# Altium PCB HandTiePCB5.PcbDoc
Units mil, origin at the board's own origin, x right, y up, seen from the top; angles counter-clockwise.
Board outline 6000 x 4000 mil, 2 copper layers (Top Layer, Bottom Layer); 48 components, 53 nets, 210 pads, 0 vias.
Unrouted connection lines stored in the file: 102.
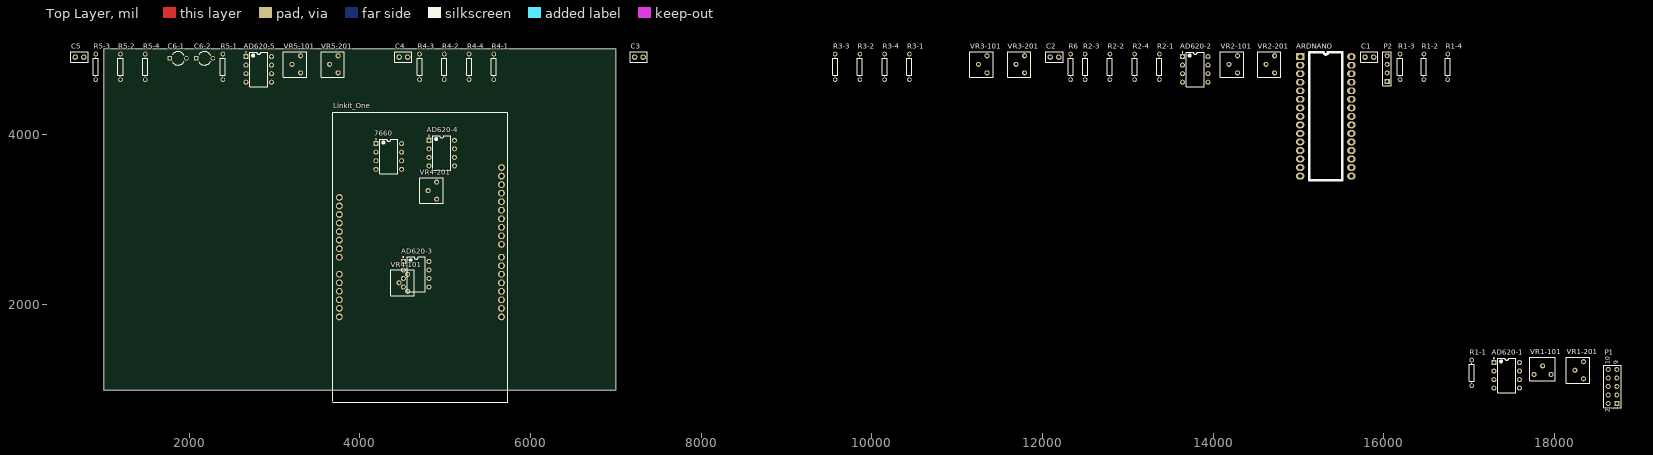
[diagram p0: Top Layer view]
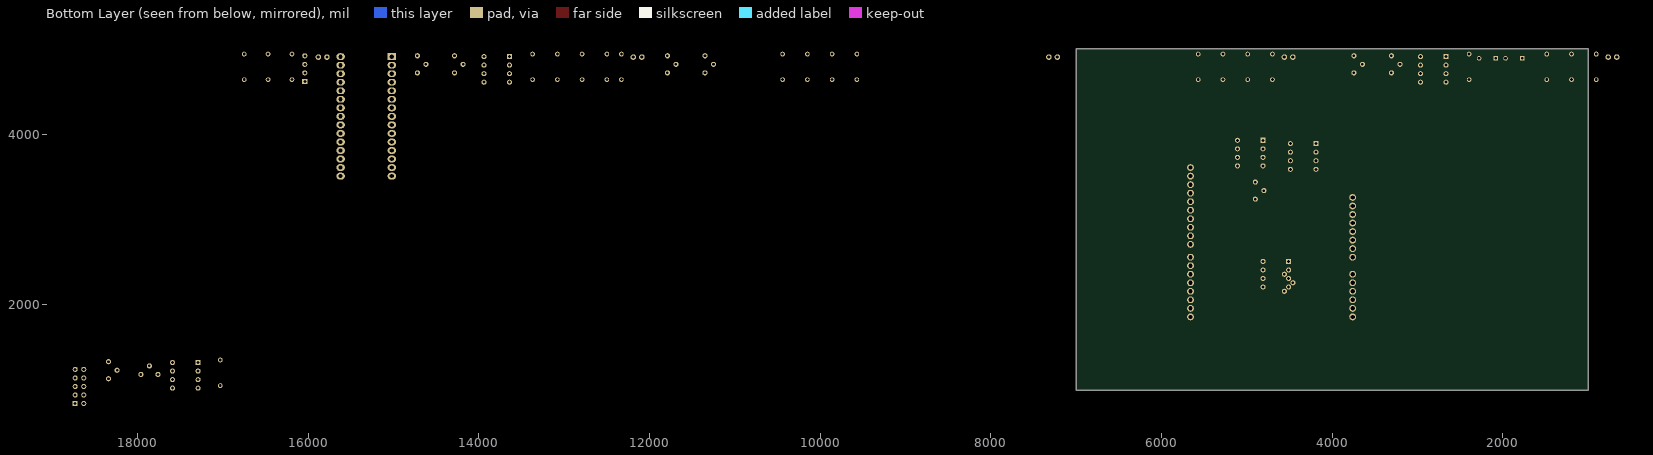
[diagram p1: Bottom Layer view, seen from below]

## Layer stack, top to bottom
Top Layer: signal copper 1.4
Dielectric: dielectric 12.6, FR-4, Dk 4.8
Bottom Layer: signal copper 1.4

## Board outline
1000,1000 7000,1000 7000,5000 1000,5000

## Design rules (kind name [scope] priority, off if disabled: settings)
Clearance [All] p1: gap=10
PolygonConnect [All] p1: connectstyle=Relief reliefconductorwidth=10 reliefentries=4 polygonreliefangle="90 Angle"
RoutingVias [All] p1: holewidth=28 width=50 viastyle="Through Hole" minholewidth=28 minwidth=50 maxholewidth=28 maxwidth=50
SilkscreenOverComponentPads [All] p1: minsilkscreentomaskgap=10
SolderMaskExpansion [All] p1: expansion=4
Width [All] p1: maxlimit=10 minlimit=10 preferedwidth=10
27 further rules are at their usual default settings.

## Components (designator, comment, footprint, x,y, rotation, side; value= is the part's Value field where it differs from the comment)
7660 "SW-DIP4" DIP-8 4340,3740 r0 top
AD620-1 "SW-DIP4" DIP-8 17440,1175 r0 top
AD620-2 "SW-DIP4" DIP-8 13790,4760 r0 top
AD620-3 "SW-DIP4" DIP-8 4660,2360 r0 top
AD620-4 "SW-DIP4" DIP-8 4960,3780 r0 top
AD620-5 "SW-DIP4" DIP-8 2815,4760 r0 top
ARDNANO "Arduino Nano" ARDNANO_DIP30 15020,4910 r0 top
C1 "Cap" CAPR2.54-5.1x3.2 15830,4905 r0 top
C2 "Cap" CAPR2.54-5.1x3.2 12140,4905 r0 top
C3 "Cap" CAPR2.54-5.1x3.2 7270,4905 r0 top
C4 "Cap" CAPR2.54-5.1x3.2 4510,4905 r0 top
C5 "Cap" CAPR2.54-5.1x3.2 715,4905 r0 top
C6-1 "Cap2" CAPR5-4X5 1870,4890 r0 top
C6-2 "Cap2" CAPR5-4X5 2180,4890 r0 top
Linkit_One "Linkit_One" Linkit_One 3760,3260 r0 top
P1 "Header 5X2" HDR2X5 18730,845 r90 top
P2 "Header 4" HDR1X4 16040,4620 r90 top
R1-1 "Res1" AXIAL-0.3 17030,1205 r90 top
R1-2 "Res1" AXIAL-0.3 16470,4790 r90 top
R1-3 "Res1" AXIAL-0.3 16190,4790 r90 top
R1-4 "Res1" AXIAL-0.3 16750,4790 r90 top
R2-1 "Res1" AXIAL-0.3 13370,4790 r90 top
R2-2 "Res1" AXIAL-0.3 12790,4790 r90 top
R2-3 "Res1" AXIAL-0.3 12500,4790 r90 top
R2-4 "Res1" AXIAL-0.3 13080,4790 r90 top
R3-1 "Res1" AXIAL-0.3 10440,4790 r90 top
R3-2 "Res1" AXIAL-0.3 9860,4790 r90 top
R3-3 "Res1" AXIAL-0.3 9570,4790 r90 top
R3-4 "Res1" AXIAL-0.3 10150,4790 r90 top
R4-1 "Res1" AXIAL-0.3 5570,4790 r90 top
R4-2 "Res1" AXIAL-0.3 4990,4790 r90 top
R4-3 "Res1" AXIAL-0.3 4700,4790 r90 top
R4-4 "Res1" AXIAL-0.3 5280,4790 r90 top
R5-1 "Res1" AXIAL-0.3 2395,4790 r90 top
R5-2 "Res1" AXIAL-0.3 1195,4790 r90 top
R5-3 "Res1" AXIAL-0.3 905,4790 r90 top
R5-4 "Res1" AXIAL-0.3 1485,4790 r90 top
R6 "Res1" AXIAL-0.3 12330,4790 r90 top
VR1-101 "VR" VarResistor 17760,1185 r0 top
VR1-201 "VR" VarResistor 18340,1135 r90 top
VR2-101 "VR" VarResistor 14285,4720 r90 top
VR2-201 "VR" VarResistor 14720,4720 r90 top
VR3-101 "VR" VarResistor 11350,4720 r90 top
VR3-201 "VR" VarResistor 11790,4720 r90 top
VR4-101 "VR" VarResistor 4560,2160 r90 top
VR4-201 "VR" VarResistor 4900,3240 r90 top
VR5-101 "VR" VarResistor 3305,4720 r90 top
VR5-201 "VR" VarResistor 3745,4720 r90 top

## Footprints (in the part's own frame and the unit in brackets; to place one, negate y for a bottom-side part, rotate by r counter-clockwise, add the part's x,y. Pads: shape width x height; smd on the part's side, far side on the other; paste and mask are expansions set on the pad)
ARDNANO_DIP30 [mil]
  rect 100x80 hole 50: 1(0,0)
  oval 100x80 hole 50: 2(0,-100) 3(0,-200) 4(0,-300) 5(0,-400) 6(0,-500) 7(0,-600) 8(0,-700) 9(0,-800) 10(0,-900) 11(0,-1000) 12(0,-1100) 13(0,-1200) 14(0,-1300) 15(0,-1400) 16(600,-1400) 17(600,-1300) 18(600,-1200) 19(600,-1100) 20(600,-1000) 21(600,-900) 22(600,-800) 23(600,-700) 24(600,-600) 25(600,-500) 26(600,-400) 27(600,-300) 28(600,-200) 29(600,-100) 30(600,0)
  silkscreen extent 105,-1450 495,50
AXIAL-0.3 [mm] "Axial Device, Thru-Hole; 2 Leads; 0.3 in Pin Spacing"
  round 1.4 hole 0.85: 1(-3.81,0) 2(3.81,0)
  silkscreen extent -2.77,-0.76 2.77,0.76
CAPR2.54-5.1x3.2 [mm] "Capacitor, Ceramic, Thru-Hole, Dipped Radial; Body 5.1 x 3.2 mm (WxT) Pin Spacing 2.54 mm (typ)"
  round 1.65 hole 1: 1(-1.27,0) 2(1.27,0)
  silkscreen extent -2.55,-1.6 2.55,1.6
CAPR5-4X5 [mm] "Capacitor; 2 Leads"
  rect 1.35x1.35 hole 0.8: 1(-2.5,0)
  round 1.35 hole 0.8: 2(2.5,0)
  silkscreen extent -1.69,-2 1.82,2
DIP-8 [mm] "DIP; 8 Leads; Row Spacing 7.62 mm; Pitch 2.54 mm"
  rect 1.5x1.5 hole 0.9: 1(-3.81,3.81)
  round 1.5 hole 0.9: 2(-3.81,1.27) 3(-3.81,-1.27) 4(-3.81,-3.81) 5(3.81,-3.81) 6(3.81,-1.27) 7(3.81,1.27) 8(3.81,3.81)
  silkscreen extent -3.93,-5.15 2.65,5.23, body extent -3.6,-5.15 3.6,5.15, height 5.08
HDR1X4 [mm] "Connector; Header; 4 Position"
  rect 1.5x1.5 hole 0.9: 1(0,0)
  round 1.5 hole 0.9: 2(2.54,0) 3(5.08,0) 4(7.62,0)
  silkscreen extent -1.27,-1.27 8.89,1.27
HDR2X5 [mm] "Connector; Header; 5x2 Position"
  rect 1.5x1.5 hole 0.9: 1(0,0)
  round 1.5 hole 0.9: 2(0,2.54) 3(2.54,0) 4(2.54,2.54) 5(5.08,0) 6(5.08,2.54) 7(7.62,0) 8(7.62,2.54) 9(10.16,0) 10(10.16,2.54)
  silkscreen extent -1.27,-1.27 11.43,3.81
Linkit_One [mil]
  round 80 hole 50 mask+4: 1(0,0) 2(0,-100) 3(0,-200) 4(0,-300) 5(0,-400) 6(0,-500) 7(0,-600) 8(0,-700) 9(0,-900) 10(0,-1000) 11(0,-1100) 12(0,-1200) 13(0,-1300) 14(0,-1400)
  round 80 hole 50: 15(1900,-1400) 16(1900,-1300) 17(1900,-1200) 18(1900,-1100) 19(1900,-1000) 20(1900,-900) 21(1900,-800) 22(1900,-700) 23(1900,-550) 24(1900,-450) 25(1900,-350) 26(1900,-250) 27(1900,-150) 28(1900,-50) 29(1900,50) 30(1900,150) 31(1900,250) 32(1900,350)
  silkscreen extent -75,-2400 1975,1000
VarResistor [mil]
  round 60 hole 30: 1(0,0) 2(100,100) 3(200,0)
  silkscreen extent -50,-75 250,200

## Part data
7660 AD620-1 AD620-2 AD620-3 AD620-4 AD620-5: "DIP Switch"
C1 C2 C3 C4 C5 C6-1 C6-2: "Capacitor"
P1: "Header, 5-Pin, Dual row"
P2: "Header, 4-Pin"
R1-1 R1-2 R1-3 R1-4 R2-1 R2-2 R2-3 R2-4 R3-1 R3-2 R3-3 R3-4 R4-1 R4-2 R4-3 R4-4 R5-1 R5-2 R5-3 R5-4 R6: "Resistor"
VR1-101 VR1-201 VR2-101 VR2-201 VR3-101 VR3-201 VR4-101 VR4-201 VR5-101 VR5-201: library part VarR

## Nets (pads, with @x,y where several pads share a name; then routed paths per layer and width w, separated by ;. In a path a pad name is that pad's centre, name@x,y a point inside that pad or via, vN(x,y) a via of type N, cw(c..) or ccw(c..) an arc to the next point about the centre after c; other vN are vias at no path point)
GND: 7660.3 AD620-1.5 AD620-2.5 AD620-3.5 AD620-4.5 AD620-5.5 ARDNANO.29 C1.2 C2.2 C3.2 C4.2 C5.2 C6-2.1 Linkit_One.6 Linkit_One.7 P2.2 R1-3.1 R2-3.1 R3-3.1 R4-3.1 R5-3.1 R6.2
GND2: Linkit_One.29 VR1-101.2 VR2-101.2 VR3-101.2 VR4-101.2 VR5-101.2
Net7660_2: 7660.2 C6-1.1
Net7660_4: 7660.4 C6-1.2
Net7660_5: 7660.5 AD620-1.4 AD620-2.4 AD620-3.4 AD620-4.4 AD620-5.4 C6-2.2
NetAD620-1_1: AD620-1.1 VR1-201.3
NetAD620-1_2: AD620-1.2 P1.10 R1-1.2
NetAD620-1_3: AD620-1.3 R1-2.2
NetAD620-1_6: AD620-1.6 R1-4.2
NetAD620-1_8: AD620-1.8 VR1-201.2
NetAD620-2_1: AD620-2.1 VR2-201.3
NetAD620-2_2: AD620-2.2 P1.8 R2-1.2
NetAD620-2_3: AD620-2.3 R2-2.2
NetAD620-2_6: AD620-2.6 R2-4.2
NetAD620-2_8: AD620-2.8 VR2-201.2
NetAD620-3_1: AD620-3.1 VR3-201.3
NetAD620-3_2: AD620-3.2 P1.6 R3-1.2
NetAD620-3_3: AD620-3.3 R3-2.2
NetAD620-3_6: AD620-3.6 R3-4.2
NetAD620-3_8: AD620-3.8 VR3-201.2
NetAD620-4_1: AD620-4.1 VR4-201.3
NetAD620-4_2: AD620-4.2 P1.4 R4-1.2
NetAD620-4_3: AD620-4.3 R4-2.2
NetAD620-4_6: AD620-4.6 R4-4.2
NetAD620-4_8: AD620-4.8 VR4-201.2
NetAD620-5_1: AD620-5.1 VR5-201.3
NetAD620-5_2: AD620-5.2 P1.2 R5-1.2
NetAD620-5_3: AD620-5.3 R5-2.2
NetAD620-5_6: AD620-5.6 R5-4.2
NetAD620-5_8: AD620-5.8 VR5-201.2
NetARDNANO_1: ARDNANO.1 Linkit_One.16
NetARDNANO_2: ARDNANO.2 Linkit_One.15
NetARDNANO_7: ARDNANO.7 P2.4
NetARDNANO_8: ARDNANO.8 P2.3
NetARDNANO_15: ARDNANO.15 R6.1
NetARDNANO_17: ARDNANO.17 P2.1
NetARDNANO_19: ARDNANO.19 C5.1 R5-4.1
NetARDNANO_20: ARDNANO.20 C4.1 R4-4.1
NetARDNANO_21: ARDNANO.21 C3.1 R3-4.1
NetARDNANO_22: ARDNANO.22 C2.1 R2-4.1
NetARDNANO_23: ARDNANO.23 C1.1 R1-4.1
NetARDNANO_30: ARDNANO.30 Linkit_One.5
NetR1-1_1: R1-1.1 VR1-101.3
NetR1-2_1: R1-2.1 R1-3.2
NetR2-1_1: R2-1.1 VR2-101.3
NetR2-2_1: R2-2.1 R2-3.2
NetR3-1_1: R3-1.1 VR3-101.3
NetR3-2_1: R3-2.1 R3-3.2
NetR4-1_1: R4-1.1 VR4-101.3
NetR4-2_1: R4-2.1 R4-3.2
NetR5-1_1: R5-1.1 VR5-101.3
NetR5-2_1: R5-2.1 R5-3.2
VCC: 7660.8 AD620-1.7 AD620-2.7 AD620-3.7 AD620-4.7 AD620-5.7 ARDNANO.27 P1.1 P1.3 P1.5 P1.7 P1.9
pads on no net: 7660.1 7660.6 7660.7 ARDNANO.3 ARDNANO.4 ARDNANO.5 ARDNANO.6 ARDNANO.9 ARDNANO.10 ARDNANO.11 ARDNANO.12 ARDNANO.13 ARDNANO.14 ARDNANO.16 ARDNANO.18 ARDNANO.24 ARDNANO.25 ARDNANO.26 ARDNANO.28 Linkit_One.1 Linkit_One.2 Linkit_One.3 Linkit_One.4 Linkit_One.8 Linkit_One.9 Linkit_One.10 Linkit_One.11 Linkit_One.12 Linkit_One.13 Linkit_One.14 Linkit_One.17 Linkit_One.18 Linkit_One.19 Linkit_One.20 Linkit_One.21 Linkit_One.22 Linkit_One.23 Linkit_One.24 Linkit_One.25 Linkit_One.26 Linkit_One.27 Linkit_One.28 Linkit_One.30 Linkit_One.31 Linkit_One.32 VR1-101.1 VR1-201.1 VR2-101.1 VR2-201.1 VR3-101.1 VR3-201.1 VR4-101.1 VR4-201.1 VR5-101.1 VR5-201.1

## Text inside footprints (layer, text, board x,y; h text height)
P1: Top Overlay "10" at 18650,1305 h50 r90; Top Overlay "9" at 18750,1305 h50 r90; Top Overlay "1" at 18750,765 h50 r90; Top Overlay "2" at 18650,745 h50 r90